# EAGLE board d pubsub_lower_isolate 220V common (EAGLE 9.4.2)
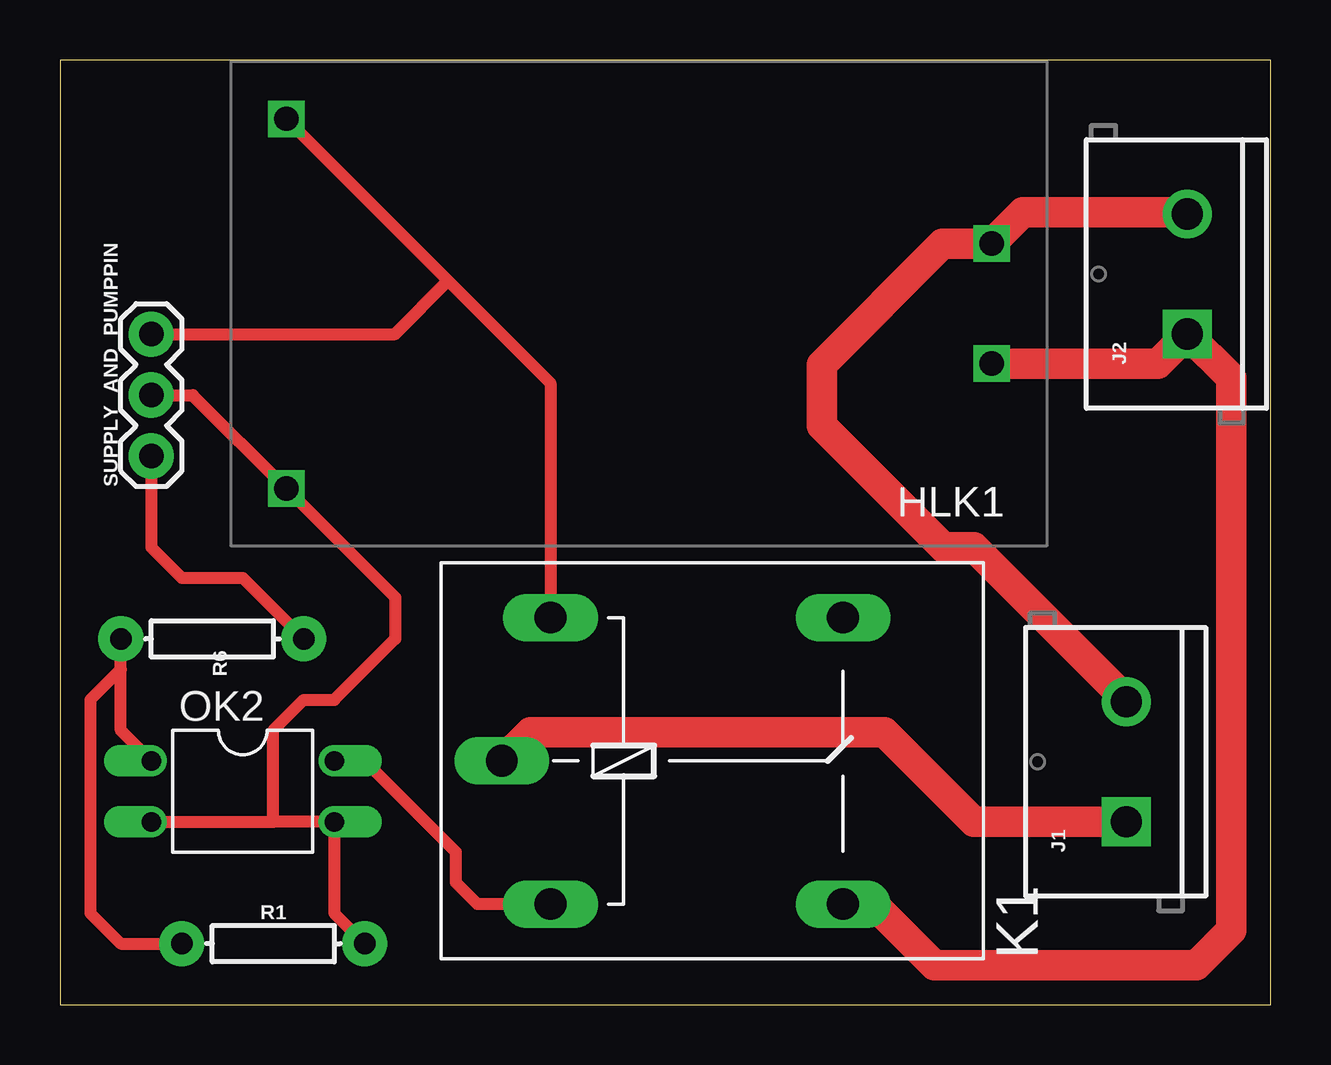
[diagram p0: board, top side]

Size 50.47 x 39.36 mm. Coordinates in mm from the lower left corner, seen from the top.
Outline: 0,0 50.47,0 50.47,39.36 0,39.36 0,0
Copper layers (1*16): Top 0.035mm / dielectric 1.5mm / Bottom 0.035mm
Design rules "default": minimum track width 6mil, minimum drill 0.35mm, track to track 6mil, track to pad 6mil, pad to pad 6mil, via to via 6mil, smd to smd 6mil, copper to edge 40mil, drill to drill 6mil, minimum pad ring 10mil, minimum via ring 8mil, stop-mask expansion 4mil, vias tented up to drill 0mil, thermal gap 10mil

## Footprints (pad centres in the part's own frame; a part is rotated, then mirrored left to right if it is on the bottom)
HLK-PM01 = drill 1.016 square: P$1 -14.7,2.5; P$2 -14.7,-2.5; P$3 14.7,7.7; P$4 14.7,-7.7
SCREWTERMINAL-5MM-2 = drill 1.3 pad 2.032 square: 1 0,0 | drill 1.3 pad 2.032: 2 5,0
G5LE = drill 1.321 long: 1 -7.493,-5.969; 2 -7.493,5.969; O 4.699,5.969; P -9.525,0; S 4.699,-5.969
DIL04 = drill 0.813 offset: 1 -1.27,-3.81; 2 1.27,-3.81; 3 1.27,3.81; 4 -1.27,3.81
AXIAL-0.3 = drill 0.9 pad 1.88: P$1 -3.81,0; P$2 3.81,0
1X03 = drill 1.016 pad 1.88: 1 0,0; 2 2.54,0; 3 5.08,0

## Placement (x,y rotation side)
HLK1  HLK-PM013W  [HLK-PM01]  24.13,29.21 180 top
J1  [SCREWTERMINAL-5MM-2]  44.45,7.62 90 top
J2  [SCREWTERMINAL-5MM-2]  46.99,27.94 90 top
K1  G5LE  [G5LE]  27.94,10.16 0 top
OK2  PC817  [DIL04]  7.62,8.89 270 top
R1  10k  [AXIAL-0.3]  8.89,2.54 0 top
R6  1k  [AXIAL-0.3]  6.35,15.24 180 top
SUPPLY_AND_PUMPPIN  455-1750-1-ND  [1X03]  3.81,22.86 90 top

## Library data of the parts
HLK1 = HLK-PM01
J1 J2 = SparkFun-Connectors; SF_SKU: PRT-08432
K1 = relay; OC_FARNELL: unknown; OC_NEWARK: unknown
OK2 = optocoupler; MPN: PC817X4J000F; OC_FARNELL: 9707727; OC_NEWARK: 97K7059
R1 = SparkFun-Resistors; PROD_ID: RES-12183
R6 = SparkFun-Resistors; PROD_ID: RES-12182
SUPPLY_AND_PUMPPIN = SparkFun-Connectors; PROD_ID: XXX-00000

## Nets
+5V: HLK1.P$4 K1.2 SUPPLY_AND_PUMPPIN.3
GND: HLK1.P$3 OK2.2 OK2.3 R1.P$2 SUPPLY_AND_PUMPPIN.2
N$2: OK2.1 R1.P$1 R6.P$2
N$8: HLK1.P$1 J2.1 K1.S
N$9: J1.1 K1.P
N$10: K1.1 OK2.4
N$11: HLK1.P$2 J1.2 J2.2
PUMP_PIN: R6.P$1 SUPPLY_AND_PUMPPIN.1

## Tracks (layer width: path | path; a pad name or v marks a point on that pad's centre or on a via)
+5V
  Top 0.508: HLK1.P$4 16.18,30.16 | 16.18,30.16 20.45,25.89 K1.2 | SUPPLY_AND_PUMPPIN.3 13.97,27.94 16.18,30.16
GND
  Top 0.508: 8.89,7.62 8.89,11.43 10.16,12.7 11.43,12.7 13.97,15.24 13.97,16.97 HLK1.P$3 5.54,25.4 SUPPLY_AND_PUMPPIN.2 | R1.P$2 11.43,3.81 OK2.3 8.89,7.62 | OK2.2 8.89,7.62
N$2
  Top 0.508: R1.P$1 2.54,2.54 1.27,3.81 1.27,12.7 2.54,13.97 R6.P$2 2.54,11.43 OK2.1
N$8
  Top 1.27: HLK1.P$1 45.76,26.71 J2.1 48.82,26.11 48.82,3.1 47.37,1.65 36.45,1.65 33.91,4.19 K1.S
N$9
  Top 1.27: K1.P 19.61,11.35 34.37,11.35 38.1,7.62 J1.1
N$10
  Top 0.508: 18.67,4.19 K1.1 17.4,4.19 16.51,5.08 16.51,6.35 12.7,10.16 OK2.4
N$11
  Top 1.27: J1.2 44.45,12.7 38.1,19.05 36.83,19.05 31.75,24.13 31.75,26.67 36.79,31.71 HLK1.P$2 40.14,33.02 46.91,33.02 J2.2
PUMP_PIN
  Top 0.508: R6.P$1 7.62,17.78 5.08,17.78 3.81,19.05 SUPPLY_AND_PUMPPIN.1